# EAGLE board blaster (EAGLE 6.2)
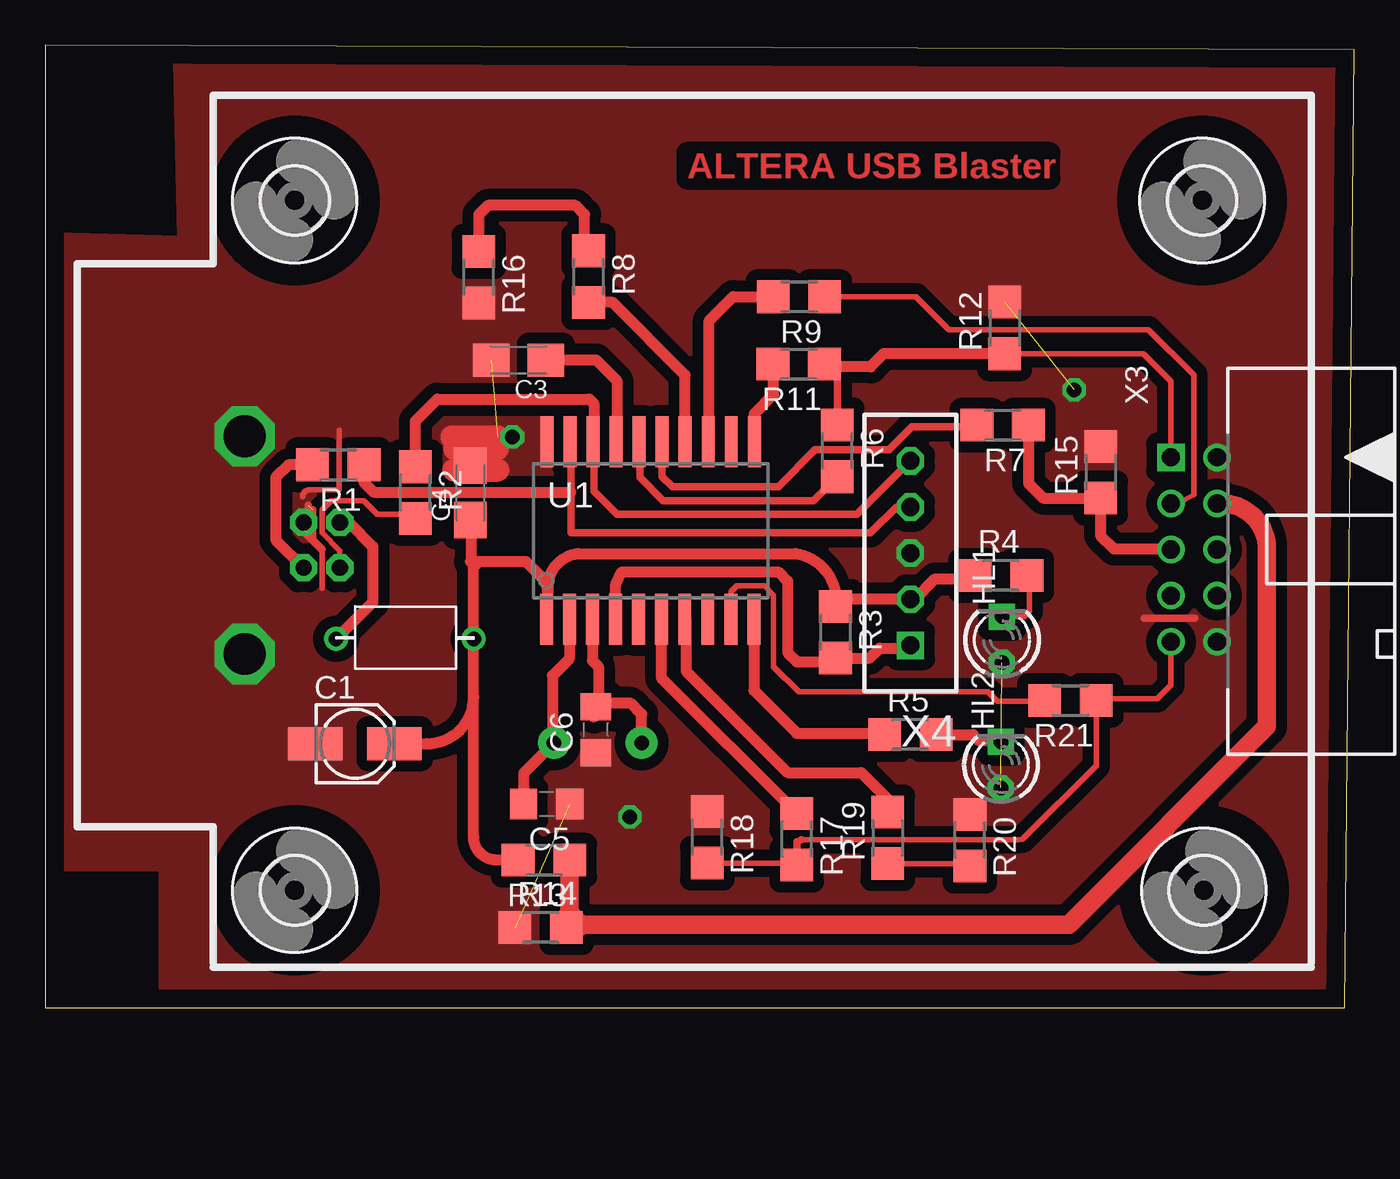
[diagram p0: board, top side]
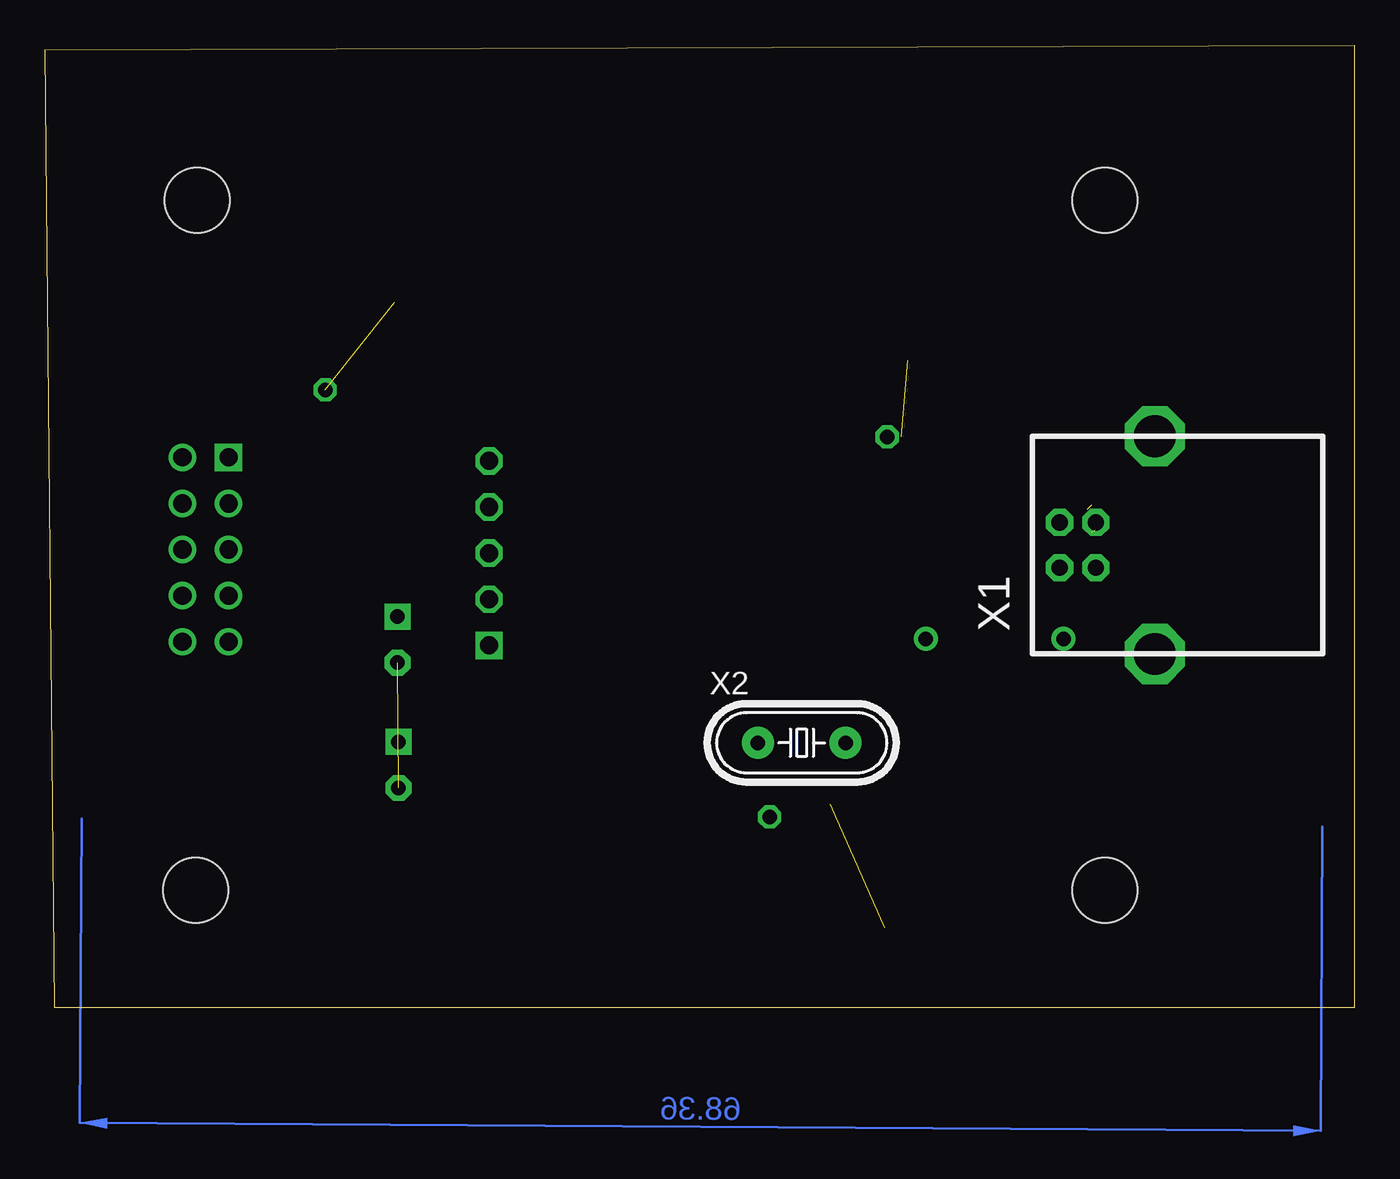
[diagram p1: board, bottom side, seen from below]

Size 72.12 x 53.01 mm. Coordinates in mm from the lower left corner, seen from the top.
Outline: 0,0 71.61,0 72.12,52.76 0,53.01 0,0
Copper layers (1*16): Top 0.035mm / dielectric 1.5mm / Bottom 0.035mm
Design rules: minimum track width 10mil, minimum drill 24mil, track to track 8mil, track to pad 8mil, pad to pad 8mil, via to via 8mil, smd to smd 8mil, copper to edge 40mil, drill to drill 8mil, minimum pad ring 10mil, minimum via ring 8mil, stop-mask expansion 4mil, vias tented up to drill 0mil, thermal gap 10mil

## Footprints (pad centres in the part's own frame; a part is rotated, then mirrored left to right if it is on the bottom)
153CLV-0405 = smd 3 x 1.8: + 2.181,0; - -2.181,0
C1206K = smd 2 x 1.8: 1 -1.5,0; 2 1.5,0
C0805D = smd 1.5 x 1.7: 1 -1.27,0; 2 1.27,0
LED3MM = drill 0.8 pad 1.422 square: A 1.27,0 | drill 0.8 pad 1.422 octagon: K -1.27,0
INDUCTOR2 = drill 0.8: P$1 -4.04,0; P$2 3.54,0
R1206 = smd 1.8 x 1.8: 1 -1.422,0; 2 1.422,0
SO20-DW = smd 0.6 x 2.2: 1 -5.715,-4.6; 2 -4.445,-4.6; 3 -3.175,-4.6; 4 -1.905,-4.6; 5 -0.635,-4.6; 6 0.635,-4.6; 7 1.905,-4.6; 8 3.175,-4.6; 9 4.445,-4.6; 10 5.715,-4.6; 11 5.715,4.6; 12 4.445,4.6; 13 3.175,4.6; 14 1.905,4.6; 15 0.635,4.6; 16 -0.635,4.6; 17 -1.905,4.6; 18 -3.175,4.6; 19 -4.445,4.6 | smd 0.711 x 2.794: 1.1 -5.74,-4.874; 1.2 -4.47,-4.874; 1.3 -3.2,-4.874; 1.4 -1.93,-4.874; 1.5 -0.66,-4.874; 1.6 0.61,-4.874; 1.7 1.88,-4.874; 1.8 3.15,-4.874; 1.9 4.42,-4.874; 1.10 5.69,-4.874; 1.11 5.715,4.905; 1.12 4.445,4.905; 1.13 3.175,4.905; 1.14 1.905,4.905; 1.15 0.635,4.905; 1.16 -0.635,4.905; 1.17 -1.905,4.905; 1.18 -3.175,4.905; 1.19 -4.445,4.905; 1.20 -5.715,4.905
3,6 = hole 3.6: 0,0
USBB-1J = drill 0.9 pad 1.5 octagon: 1 1.25,1; 2 -1.25,1; 3 -1.25,-1; 4 1.25,-1 | drill 2.3 octagon: 5 -6,-4.25; 6 6,-4.25
HC49/S = drill 0.8 pad 1.778: 1 -2.413,0; 2 2.413,0
PAK100/2500-5-10 = drill 1 pad 1.422 square: 1 -5.08,-1.27 | drill 1 pad 1.422: 2 -5.08,1.27; 3 -2.54,-1.27; 4 -2.54,1.27; 5 0,-1.27; 6 0,1.27; 7 2.54,-1.27; 8 2.54,1.27; 9 5.08,-1.27; 10 5.08,1.27
PLC-5PIN = drill 1 square: P$1 0,5.08 | drill 1 octagon: P$2 0,2.54; P$3 0,0; P$4 0,-2.54; P$5 0,-5.08

## Placement (x,y rotation side)
C1  SMD_EL_CAP  [153CLV-0405]  17.06,14.54 0 top
C3  [C1206K]  26.08,35.67 180 top
C4  [C1206K]  23.41,28.37 90 top
C5  15p  [C0805D]  27.62,11.22 180 top
C6  15p  [C0805D]  30.33,15.32 90 top
HL1  LED3MM  [LED3MM]  52.72,20.27 90 top
HL2  LED3MM  [LED3MM]  52.66,13.38 90 top
L1  INDUCTORIND2  [INDUCTOR2]  19.56,20.32 180 top
R1  SMD_RES  [R1206]  16.14,29.91 180 top
R2  SMD_RES  [R1206]  20.39,28.38 270 top
R3  10k  [R1206]  43.54,20.68 270 top
R4  1k  [R1206]  52.66,23.8 0 top
R5  1k  [R1206]  47.66,15.05 0 top
R6  100  [R1206]  43.64,30.67 270 top
R7  100  [R1206]  52.75,32.09 180 top
R8  100  [R1206]  29.93,40.27 270 top
R9  100  [R1206]  41.52,39.17 180 top
R11  100  [R1206]  41.51,35.46 180 top
R12  200  [R1206]  52.86,37.45 90 top
R13  100  [R1206]  27.47,8.13 180 top
R14  200  [R1206]  27.29,4.41 0 top
R15  200  [R1206]  58.15,29.5 90 top
R16  200  [R1206]  23.88,40.23 270 top
R17  100  [R1206]  41.4,9.28 270 top
R18  200  [R1206]  36.47,9.39 270 top
R19  100  [R1206]  46.41,9.36 90 top
R20  200  [R1206]  50.94,9.23 270 top
R21  100  [R1206]  56.48,16.93 180 top
U1  PIC18F14K50D  [SO20-DW]  33.35,26.27 0 top
U$1  [3,6]  13.74,44.47 0 top
U$2  [3,6]  13.74,6.47 0 top
U$3  [3,6]  63.84,6.47 0 top
U$4  [3,6]  63.74,44.47 0 top
X1  USBB-1J  [USBB-1J]  15.23,25.49 90 bottom
X2  12М  [HC49/S]  30.44,14.59 0 bottom
X3  X  [PAK100/2500-5-10]  63.29,25.24 270 top
X4  PIC_ISP_CONN  [PLC-5PIN]  47.67,25.04 180 top

## Library data of the parts
C1 C3 C4 L1 R1-R9 R11-R21 U1 = Dmitry
C5 C6 HL1 HL2 X1 X2 X4 = den
U$1-U$4 = holes
X3 = Dmitry; MF: 3M; MPN: 2510-6002UB; OC_FARNELL: 1788669; OC_NEWARK: unknown

## Nets
+5V: C1.+ C4.1 L1.P$1 R3.1 R4.1 R13.2 U1.1.1 X4.P$2
GND: C1.- C3.2 C4.2 C5.1 C6.1 HL1.K HL2.K R12.2 R14.1 R15.2 R16.2 R18.1 R20.1 U1.1.20 X1.4 X1.5 X1.6 X3.2 X3.10 X4.P$3
MCLR: R3.2 U1.1.4 X4.P$1
N$2: R1.2 X1.3
N$3: L1.P$2 X1.1
N$4: R2.2 X1.2
N$5: C3.1 U1.1.17
N$6: HL1.A R4.2
N$7: R5.1 U1.1.10
N$8: C5.2 U1.1.2 X2.2
N$9: C6.2 U1.1.3 X2.1
N$10: HL2.A R5.2
N$12: R6.2 U1.1.16
N$13: R17.1 U1.1.6
N$14: R7.2 U1.1.15
N$15: R8.2 U1.1.14
N$16: R9.2 U1.1.13
N$18: R11.2 U1.1.11
N$19: R19.2 U1.1.7
N$20: R21.2 U1.1.9
N$22: X3.7
NCE: R8.1 R16.1
NCS: R19.1 R20.2
PGC: R2.1 U1.1.18 X4.P$5
PGD: R1.1 U1.1.19 X4.P$4
TCK: R6.1 R11.1 R12.1 X3.1
TDI: R17.2 R18.2 R21.1 X3.9
TDO: R9.1 X3.3
TMS: R7.1 R15.1 X3.5
VCC_3.3: R13.1 R14.2 X3.4

## Tracks (layer width: path | path; a pad name or v marks a point on that pad's centre or on a via)
+5V
  Top 0.61: 50.55,23.37 50.55,23.49 R4.1 50.68,23.62 49.02,23.62 47.9,22.5 X4.P$2 43.38,22.5 | 27.69,22.86 27.69,23.37 26.47,24.58 23.88,24.58 | U1.1.1 27.69,21.4 27.69,22.86 | 27.69,22.86 arc-90 29.34,25.02 41.33,25.02 arc-90 R3.1 | 23.62,26.66 C4.1 23.41,26.37 23.5,26.29 23.5,24.65 23.43,24.58 23.88,24.58 | 23.88,24.58 23.6,24.3 L1.P$1 23.6,17.12 | C1.+ 21.02,14.54 arc90 23.6,17.12 | 23.6,17.12 23.6,9.4 arc90 24.86,8.13 R13.2
  Top 0.813: 43.38,22.5 R3.1
GND  (via drill 0.8 pad 1.27)  (6 unrouted)
  Top 0.305: 15.24,23.11 15.24,25.15 14.22,26.16 | 15.32,25.25 14.3,26.26 | 16.18,31.8 16.18,28.52 14.55,28.52 arc90 14.17,28.14
  Top 0.406: 14.48,27.69 14.48,26.16 | 14.73,27.43 14.73,25.91 | 60.55,21.46 63.35,21.46
  Top 1.27: 22.4,31.45 24.94,31.45 | 22.55,30.79 24.89,30.79 | 22.5,29.62 24.94,29.62
  other vias: 25.73,31.45 32.21,10.52 56.69,34.04
  pour Top (isolate 0.61, no thermals): 7.11,53.34 71.63,53.34 70.87,-0.51 6.35,-0.51 6.35,7.62 -1.52,7.62 -1.52,42.67 7.37,42.42
MCLR
  Top 0.61: 47.52,19.81 45.97,19.81 45.42,19.26 R3.2 42.77,19.05 41.4,19.05 40.89,19.56 40.89,23.5 40.39,24 31.75,24 31.42,23.29 U1.1.4
  Top 0.813: 47.52,19.81 X4.P$1
N$2
  Top 0.61: R1.2 13.4,29.91 12.7,29.21 12.7,25.76 X1.3
N$3
  Top 0.61: X1.1 16.7,26.74 18.03,25.4 18.03,22.34 L1.P$2
N$4
  Top 0.305: X1.2 16.23,25.18 15.24,26.16 15.24,27.43 15.75,27.94 17.53,27.94 18.29,27.18 20.17,27.18 R2.2
N$5
  Top 0.61: U1.1.17 31.5,31.23 31.5,34.54 30.37,35.67 C3.1
N$6
  Top 0.305: HL1.A 53.93,21.55 54.23,21.84 54.23,23.66 R4.2
N$7
  Top 0.61: U1.1.10 39.04,17.48 41.4,15.11 46.17,15.11 R5.1
N$8
  Top 0.61: U1.1.2 28.88,19.23 27.94,18.29 27.94,14.68 X2.2 26.35,12.92 C5.2
N$9
  Top 0.61: U1.1.3 30.15,19.13 30.48,18.8 30.48,16.26 30.23,16 30.23,16.48 C6.2 30.51,16.76 32.26,16.76 32.85,16.17 X2.1
N$10
  Top 0.61: R5.2 51.12,15.04 51.44,14.73 52.57,14.73 HL2.A
N$12
  Top 0.406: 32.77,31.13 32.77,29.21 34.04,27.94 42.33,27.94 R6.2
  Top 0.61: 32.77,31.13 U1.1.16
N$13
  Top 0.61: R17.1 33.96,18.15 U1.1.6
N$14
  Top 0.305: 51.24,32 R7.2
  Top 0.406: U1.1.15 33.98,29.26 34.54,28.7 40.39,28.7 42.42,30.73 46.48,30.73 47.75,32 51.24,32
N$15
  Top 0.61: U1.1.14 35.25,34.85 31.25,38.85 R8.2
N$16
  Top 0.61: U1.1.13 36.58,31.23 36.58,37.85 37.9,39.17 R9.2
N$18
  Top 0.61: U1.1.11 39.06,32.72 40.13,33.78 40.13,35.41 R11.2
N$19
  Top 0.61: U1.1.7 35.31,21.32 35.31,18.54 40.89,12.95 44.96,12.95 46.41,11.5 R19.2
N$20
  Top 0.305: U1.1.9 37.77,22.91 38.1,23.24 39.62,23.24 40.13,22.73 40.13,18.8 41.53,17.4 51.94,17.4 52.45,16.89 55.02,16.89 R21.2
NCE
  Top 0.61: R8.1 29.72,41.91 29.72,43.69 29.21,44.2 24.38,44.2 23.88,43.69 R16.1
NCS
  Top 0.305: R19.1 50.81,7.94 R20.2
PGC
  Top 0.406: 30.23,31.23 30.23,28.45 31.5,27.18 44.73,27.18 X4.P$5
  Top 0.61: R2.1 20.39,32.33 21.59,33.53 29.97,33.53 30.23,33.27 30.23,31.23 U1.1.18
PGD
  Top 0.406: 28.96,31.13 28.96,28.4 28.96,26.16 45.47,26.16 46.89,27.58 X4.P$4
  Top 0.61: 28.96,31.13 U1.1.19 | 28.96,28.4 18.09,28.4 17.56,28.92 R1.1
TCK
  Top 0.305: R12.1 60.49,36.03 62.03,34.52 62.03,30.81 X3.1
  Top 0.406: R6.1 43.64,34.75 R11.1
  Top 0.61: R12.1 46.19,36.03 45.47,35.31 43.08,35.31
  Top 0.813: 43.08,35.31 R11.1
TDI
  Top 0.305: 41.66,9.25 53.59,9.25 53.85,9.27 57.9,13.32 R21.1 57.99,17.02 61.27,17.02 62.02,17.77 X3.9 | R18.2 41.3,7.97 R17.2
  Top 0.406: R17.2 41.4,9.14 41.66,9.25
TDO
  Top 0.305: R9.1 47.96,39.17 49.78,37.34 60.78,37.34 63.27,34.87 63.27,28.27 62.48,27.81 X3.3
TMS
  Top 0.61: R7.1 54.17,28.89 54.99,28.07 56.63,28.07 R15.1 58.15,26 58.88,25.27 62.44,25.27 X3.5
VCC_3.3
  Top 1.016: R13.1 28.89,5.08 | X3.4 arc-90 67.31,25.49 67.31,15.49 56.39,4.57 29.4,4.57
  Top 1.27: R14.2 28.89,4.41 28.89,5.08 arc90 29.4,4.57
(copper drawn outside any net)
  shapes: Bottom area x1

## Text on the board
Top: ALTERA USB Blaster